# Altium PCB PCB_arduino_uno_cong_polygon.PcbDoc
Units mm, origin at the board's own origin, x right, y up, seen from the top; angles counter-clockwise.
Board outline 82.8 x 51.56 mm, 2 copper layers (Top Layer, Bottom Layer); 55 components, 54 nets, 241 pads, 63 vias.
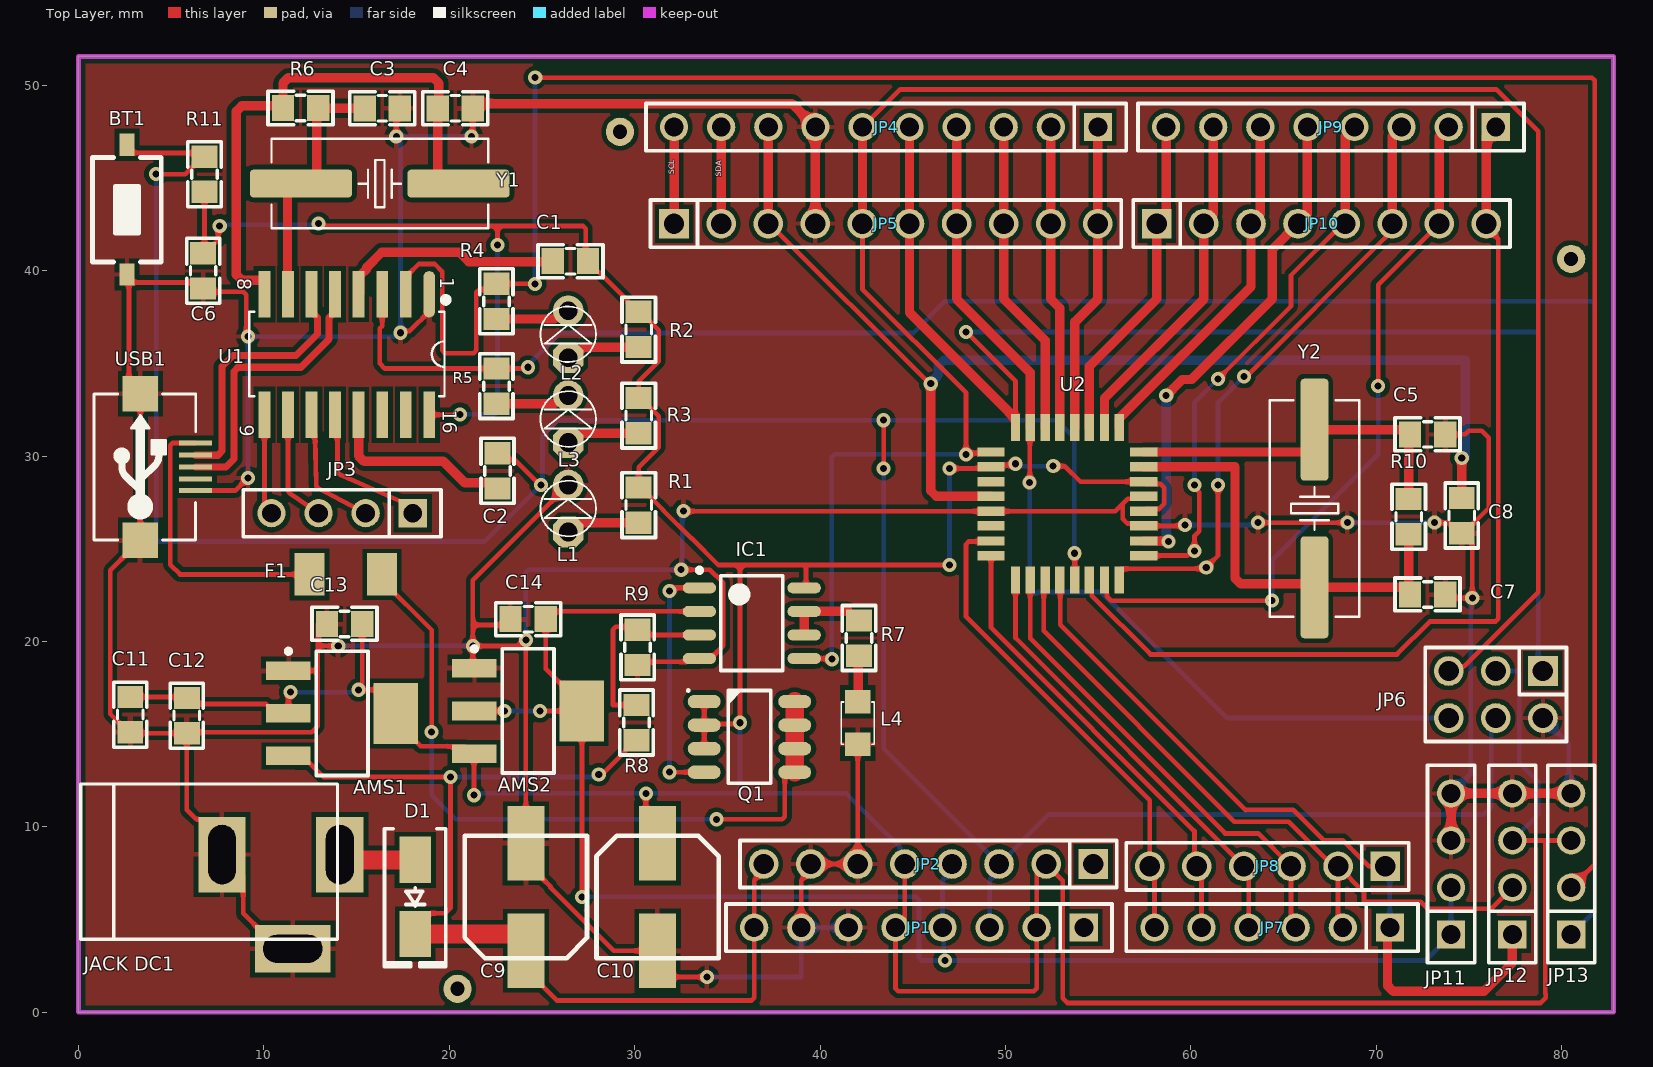
[diagram p0: Top Layer view]
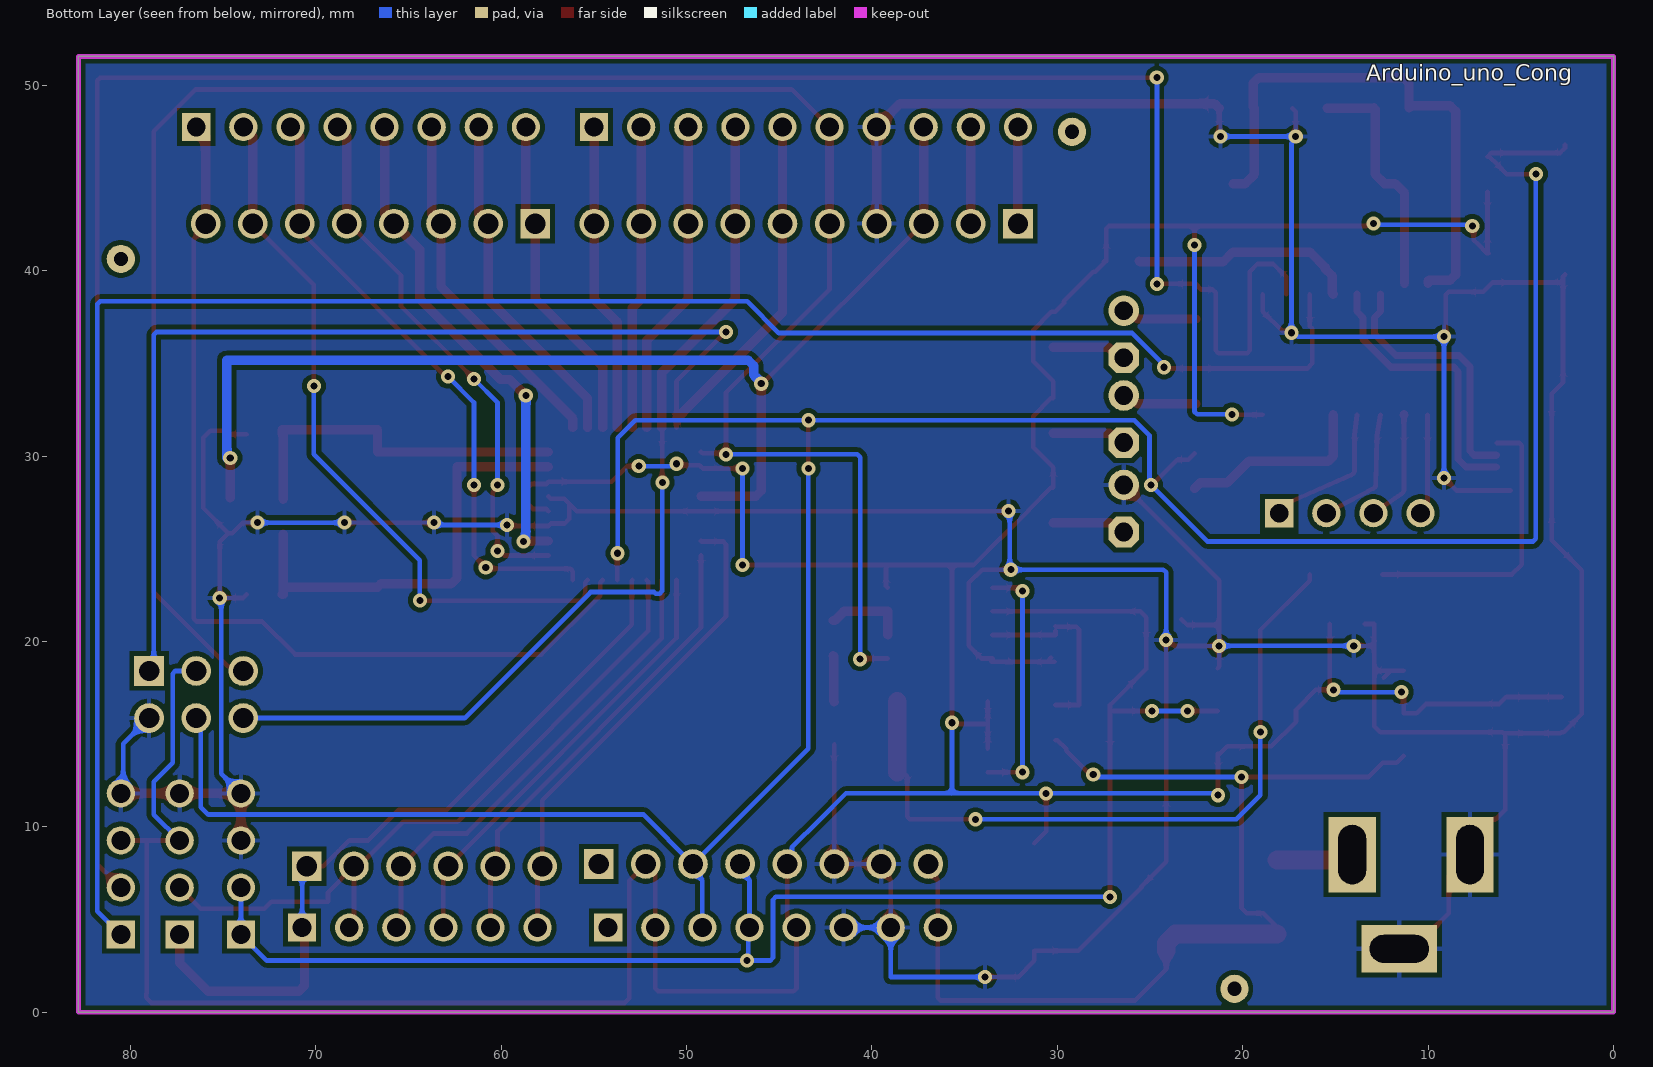
[diagram p1: Bottom Layer view, seen from below]
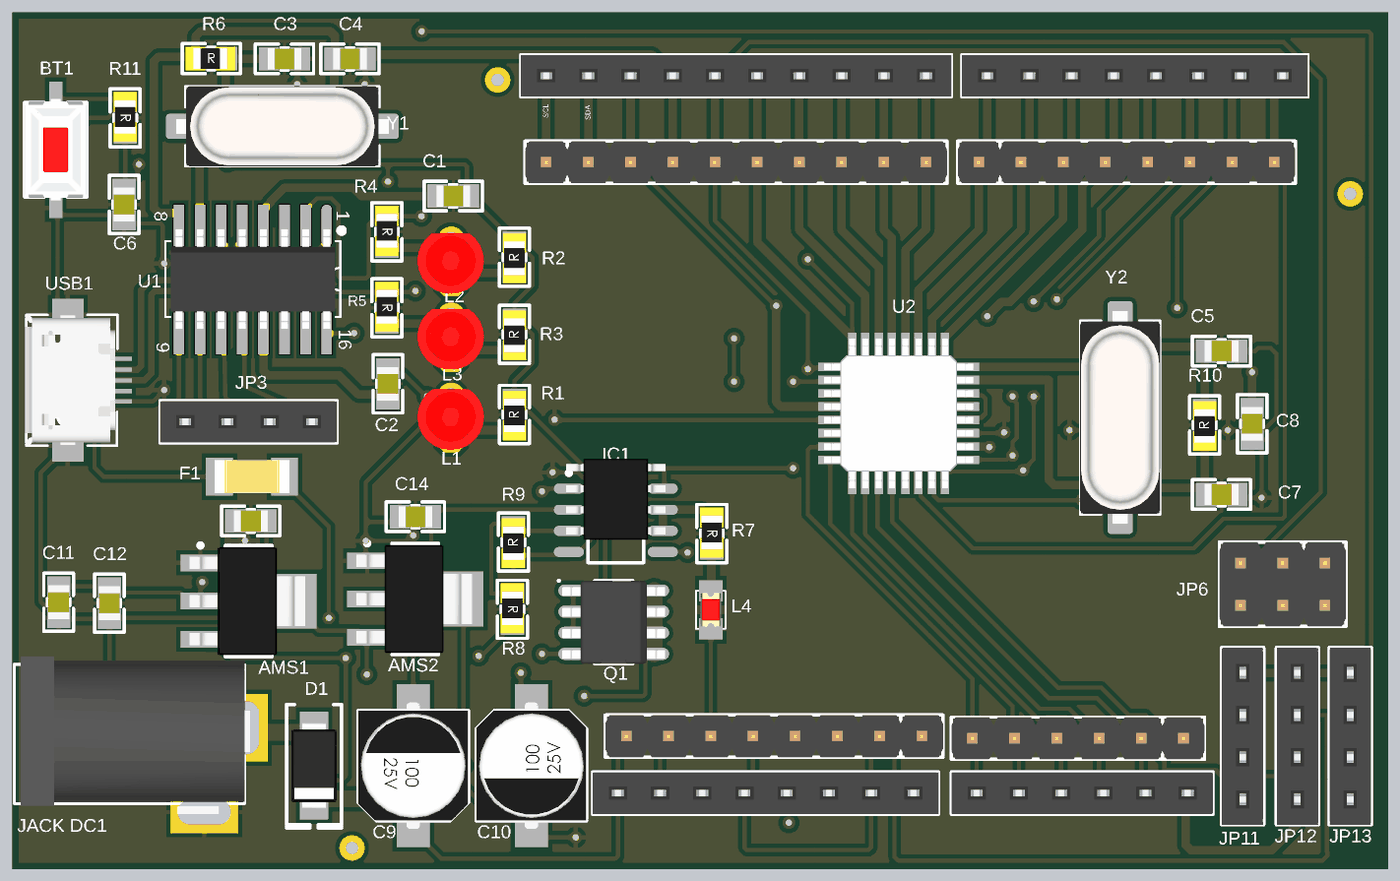
[diagram p2: 3D render of the assembled board from above, using the file's embedded part models]

## Layer stack, top to bottom
Top Solder: solder mask 0.0102, Solder Resist, Dk 3.5
Top Layer: signal copper 0.0356
Dielectric 1: dielectric 0.32, FR-4, Dk 4.8
Bottom Layer: signal copper 0.0356
Bottom Solder: solder mask 0.0102, Solder Resist, Dk 3.5

## Board outline
0,0 82.804,0 82.804,51.562 0,51.562

## Design rules (kind name [scope] priority, off if disabled: settings)
Clearance [All] p1: gap=0.254 ignorepadtopadclearanceinfootprint=FALSE except(0: Arc-Hole Track-Hole SMDPad-Hole THPad-Hole Via-Hole Fill-Hole Poly-Hole Region-Hole Text-Hole)
DiffPairsRouting [All] p1: maxlimit=0.254 minlimit=0.254 mostfreqgap=0.254 toplayer_minwidth=0.381 toplayer_maxwidth=0.381 toplayer_prefwidth=0.381 bottomlayer_minwidth=0.381 bottomlayer_maxwidth=0.381 bottomlayer_prefwidth=0.381 maxuncoupledlength=12.7
PolygonConnect [All] p1: connectstyle=Relief reliefconductorwidth=0.254 reliefentries=4 polygonreliefangle="90 Angle" airgapwidth=0.254
RoutingVias [All] p1: holewidth=0.381 width=0.762 viastyle="Through Hole" minholewidth=0.254 minwidth=0.508 maxholewidth=0.711 maxwidth=1.27
SolderMaskExpansion [IsVia] p1: expansion=0.102 istentingtop=TRUE
SolderMaskExpansion SolderMaskExpansion_1 [IsVia] p2: expansion=0.102 istentingtop=TRUE useseparateexpansions=TRUE expansionbottom=0.102 istentingbottom=TRUE
Width [All] p1: maxlimit=1.016 minlimit=0.254 preferedwidth=0.508
29 further rules are at their usual default settings.

## Classes and differential pairs
differential pair USB: +USB_P -USB_N

## Components (designator, comment, footprint, x,y, rotation, side; value= is the part's Value field where it differs from the comment)
AMS1 "AMS1117-3.3V" SOT223 14.224,16.129 r270 top value="AMS1117-3.3V SOT223"
AMS2 "AMS1117-3.3V" SOT223 24.257,16.256 r270 top value="AMS1117-3.3V SOT223"
BT1 "Nut Nhan 2 Chan SMD 3x6x2.5" "Nut Nhan 2 Chan SMD 3x6x2.5" 2.616,43.296 r90 top
C1 "104" "tu 0805" 26.543,40.513 r180 top
C2 "104" "tu 0805" 22.606,29.21 r270 top
C3 "22pF" "tu 0805" 16.383,48.768 r0 top
C4 "22pF" "tu 0805" 20.32,48.768 r0 top
C5 "104" "tu 0805" 72.772,31.18 r0 top
C6 "104" "tu 0805" 6.731,40.005 r270 top
C7 "104" "tu 0805" 72.772,22.544 r0 top
C8 "104" "tu 0805" 74.619,26.802 r270 top
C9 "47uF" "tu nhom 6.3 (d)" 24.13,6.223 r90 top
C10 "47uF" "tu nhom 6.3 (d)" 31.242,6.223 r270 top
C11 "104" "tu 0805" 2.791,16.059 r90 top
C12 "104" "tu 0805" 5.842,16.002 r90 top
C13 "104" "tu 0805" 14.351,20.955 r0 top
C14 "104" "tu 0805" 24.257,21.209 r0 top
D1 "M7" "DIODE SMA" 18.161,6.223 r270 top
F1 "0.5A 125V" "Cau Chi SMD1808" 14.427,23.622 r0 top
IC1 "LM358 SOP8" "SOP 8" 36.322,20.993 r0 top
"JACK DC1" "JACK DC 5.5" "JACK DC 5.5" 10.922,5.969 r0 top value="Jac DC"
JP1 "JP 1x8 2.54" "JP 1x8 CT" 54.229,4.572 r180 top
JP2 "JP 1x8 2.54" "JP 1x8 DT" 54.737,8.001 r180 top
JP3 "JP 1x4 2.54" "JP 1x4 CT" 18.034,26.924 r180 top
JP4 "JP 1x10 2.54" "JP 1x10 CT" 54.991,47.752 r180 top
JP5 "JP 1x10 2.54" "JP 1x10 DT" 32.127,42.545 r0 top
JP6 "JP 2x3 2.54" "JP 2x3 DT" 76.454,17.145 r180 top
JP7 "JP 1x6 2.54" "JP 1x6 CT" 70.739,4.572 r180 top
JP8 "JP 1x6 2.54" "JP 1x6 DT" 70.485,7.874 r180 top
JP9 "JP 1x8 2.54" "JP 1x8 CT" 76.45,47.752 r180 top
JP10 "JP 1x8 2.54" "JP 1x8 DT" 58.166,42.545 r0 top
JP11 "JP 1x4 2.54" "JP 1x4 CT" 74.041,4.191 r90 top
JP12 "JP 1x4 2.54" "JP 1x4 CT" 77.343,4.191 r90 top
JP13 "JP 1x4 2.54" "JP 1x4 CT" 80.518,4.191 r90 top
L1 "LED 3mm" LED-3MM-RED 26.416,25.908 r90 top
L2 "LED 3mm" LED-3MM-RED 26.416,35.306 r90 top
L3 "LED 3mm" LED-3MM-RED 26.416,30.734 r90 top
L4 "LED 0805" LED-0805-Red 42.037,16.747 r270 top
Q1 "MOSFET_P" SO-8 36.195,14.859 r0 top
R1 "1k" "tro smd 0805" 30.16,27.362 r90 top
R2 "1k" "tro smd 0805" 30.16,36.83 r90 top
R3 "1k" "tro smd 0805" 30.16,32.188 r90 top
R4 "1k" "tro smd 0805" 22.606,38.354 r270 top
R5 "1k" "tro smd 0805" 22.606,33.782 r270 top
R6 "1M" "tro smd 0805" 11.98,48.844 r0 top
R7 "1k" "tro smd 0805" 42.162,20.193 r270 top
R8 "10k" "tro smd 0805" 30.16,15.634 r270 top
R9 "10k" "tro smd 0805" 30.099,19.685 r90 top
R10 "10k" "tro smd 0805" 71.694,26.732 r90 top
R11 "10k" "tro smd 0805" 6.858,45.212 r270 top
U1 "CH340C" SOIC16_50_284_25X90_SMT 14.503,35.485 r270 top
U2 "ATMEGA168-20AU" ATMEGA168 53.34,27.432 r180 top
USB1 "USB Micro 5p SMD" "USB Micro 5p SMD" 6.307,29.415 r90 top
Y1 "16Mhz" "Thach Anh 2 chan SMD" 16.256,44.704 r180 top value=4Mhz
Y2 "16Mhz" "Thach Anh 2 chan SMD" 66.675,27.178 r90 top value=4Mhz

## Footprints (in the part's own frame and the unit in brackets; to place one, negate y for a bottom-side part, rotate by r counter-clockwise, add the part's x,y. Pads: shape width x height; smd on the part's side, far side on the other; paste and mask are expansions set on the pad)
ATMEGA168 [mil]
  rect 58x20 smd: 1(-162,110) 2(-162,79) 3(-162,47) 4(-162,16) 5(-162,-16) 6(-162,-47) 7(-162,-79) 8(-162,-110) 17(162,-110) 18(162,-79) 19(162,-47) 20(162,-16) 21(162,16) 22(162,47) 23(162,79) 24(162,110)
  rect 20x58 smd: 9(-110,-162) 10(-79,-162) 11(-47,-162) 12(-16,-162) 13(16,-162) 14(47,-162) 15(79,-162) 16(110,-162) 25(110,162) 26(79,162) 27(47,162) 28(16,162) 29(-16,162) 30(-47,162) 31(-79,162) 32(-110,162)
  body extent -177,-177 177,177, height 47
"Cau Chi SMD1808" [mil]
  rect 64x90 smd: 1(-77,0) 2(77,0)
  body extent -91,-39 91,39, height 39
"DIODE SMA" [mm] "SMA"
  rect 2.5x1.7 smd: 1(-2,0) 2(2,0)
  silkscreen extent -3.68,-1.65 3.75,1.65, body extent -2.6,-1.37 2.6,1.37, height 2.4
"JACK DC 5.5" [mm] "Jac DC input"
  rect 2.54x4.064 hole 1.5 slot 3.2 at 90 deg: 1(3.175,2.54) 2(-3.175,2.54)
  rect 4.064x2.54 hole 1.5 slot 3.2 at 0 deg: 3(0.635,-2.54)
  silkscreen extent -10.79,-2.03 3.05,6.35, body extent -10.42,-2.67 3.4,6.84, height 11.02
"JP 1x4 CT" [mm]
  rect 1.52x1.52 hole 1.02: 1(0,0)
  round 1.52 hole 1.02: 2(2.54,0) 3(5.08,0) 4(7.62,0)
  silkscreen extent -1.52,-1.27 9.14,1.27, body extent -1.52,-1.25 9.14,1.25, height 8.51
"JP 1x6 CT" [mm] "6 row, straight, gold plating"
  rect 1.52x1.52 hole 1.02: 1(0,0)
  round 1.52 hole 1.02: 2(2.54,0) 3(5.08,0) 4(7.62,0) 5(10.16,0) 6(12.7,0)
  silkscreen extent -1.52,-1.27 14.22,1.27, body extent -1.52,-1.25 14.22,1.25, height 8.51
"JP 1x6 DT" [mm] "6 pins, 1 row, straight, gold plating"
  rect 1.6x1.6 hole 1.1: 1(0,0)
  round 1.6 hole 1.1: 2(2.54,0) 3(5.08,0) 4(7.62,0) 5(10.16,0) 6(12.7,0)
  silkscreen extent -1.27,-1.27 13.97,1.27, body extent -1.27,-1.27 13.97,1.27, height 8.54
"JP 1x8 CT" [mm] "8 row, straight, gold plating"
  rect 1.52x1.52 hole 1.02: 1(0,0)
  round 1.52 hole 1.02: 2(2.54,0) 3(5.08,0) 4(7.62,0) 5(10.16,0) 6(12.7,0) 7(15.24,0) 8(17.78,0)
  silkscreen extent -1.52,-1.27 19.3,1.27, body extent -1.52,-1.25 19.3,1.25, height 8.51
"JP 1x8 DT" [mm] "8 pins, 1 row, straight, gold plating"
  rect 1.6x1.6 hole 1.1: 1(0,0)
  round 1.6 hole 1.1: 2(2.54,0) 3(5.08,0) 4(7.62,0) 5(10.16,0) 6(12.7,0) 7(15.24,0) 8(17.78,0)
  silkscreen extent -1.27,-1.27 19.05,1.27, body extent -1.27,-1.27 19.05,1.27, height 8.54
"JP 1x10 CT" [mm] "10 row, straight, gold plating"
  rect 1.52x1.52 hole 1.02: 1(0,0)
  round 1.52 hole 1.02: 2(2.54,0) 3(5.08,0) 4(7.62,0) 5(10.16,0) 6(12.7,0) 7(15.24,0) 8(17.78,0) 9(20.32,0) 10(22.86,0)
  silkscreen extent -1.52,-1.27 24.38,1.27, body extent -1.52,-1.25 24.38,1.25, height 8.51
"JP 1x10 DT" [mm] "10 pins, 1 row, straight, gold plating"
  rect 1.6x1.6 hole 1.1: 1(0,0)
  round 1.6 hole 1.1: 2(2.54,0) 3(5.08,0) 4(7.62,0) 5(10.16,0) 6(12.7,0) 7(15.24,0) 8(17.78,0) 9(20.32,0) 10(22.86,0)
  silkscreen extent -1.27,-1.27 24.13,1.27, body extent -1.27,-1.27 24.13,1.27, height 8.54
"JP 2x3 DT" [mm]
  rect 1.6x1.6 hole 1.1: 1(-2.54,-1.27)
  round 1.6 hole 1.1: 2(0,-1.27) 3(2.54,-1.27) 4(2.54,1.27) 5(0,1.27) 6(-2.54,1.27)
  silkscreen extent -3.81,-2.54 3.81,2.54, body extent -3.81,-2.54 3.81,2.54, height 8.55
LED-3MM-RED [mil]
  oct 65x65 hole 40: 1(0,0)
  round 65 hole 40: 2(100,0)
  silkscreen extent -9,-59 109,59, body extent -27,-77 117,80, height 181
LED-0805-Red [mil]
  rect 50x55 smd: 1(0,0) 2(90,0)
  silkscreen extent 0,-35 90,35, body extent 5,-25 85,25, height 43
"Nut Nhan 2 Chan SMD 3x6x2.5" [mm] "Switch SMD type"
  rect 1.2x0.8 smd: 1(-3.5,0) 2(3.5,0)
  silkscreen extent -2.82,-1.85 2.82,1.85, body extent -3.05,-1.85 3.05,1.85, height 2.5
SO-8 [mm] "SOIC, 8-Leads, Body 4.90x3.90mm, Pitch 1.27mm, IPC Medium Density"
  oval 1.78x0.72 smd: 1(-2.44,1.905) 2(-2.44,0.635) 3(-2.44,-0.635) 4(-2.44,-1.905) 5(2.44,-1.905) 6(2.44,-0.635) 7(2.44,0.635) 8(2.44,1.905)
  silkscreen extent -3.3,-2.5 1.14,2.5, body extent -3.1,-2.5 3.1,2.5, height 1.75
SOIC16_50_284_25X90_SMT [mm]
  oval 2.5x0.635 smd mask+0.076: 1(-3.25,4.42)
  rect 2.5x0.635 smd mask+0.076: 2(-3.25,3.15) 3(-3.25,1.88) 4(-3.25,0.61) 5(-3.25,-0.66) 6(-3.25,-1.93) 7(-3.25,-3.2) 8(-3.25,-4.47) 9(3.25,-4.47) 10(3.25,-3.2) 11(3.25,-1.93) 12(3.25,-0.66) 13(3.25,0.61) 14(3.25,1.88) 15(3.25,3.15) 16(3.25,4.42)
  silkscreen extent -3.07,-5.3 2.26,5.44, body extent -3.02,-4.97 2.98,4.93, height 1.4
"SOP 8" [mm] "SOIC, 8-Leads, Body 4.9x3.9mm, Pitch 1.27mm, IPC High Density"
  oval 1.8x0.6 smd: 1(-2.825,1.905) 2(-2.825,0.635) 3(-2.825,-0.635) 4(-2.825,-1.905) 5(2.825,-1.905) 6(2.825,-0.635) 7(2.825,0.635) 8(2.825,1.905)
  silkscreen extent -2.95,-2.55 1.68,2.98, body extent -2.99,-1.18 3,3.72, height 1.8
SOT223 [mm]
  rect 1x2.4 smd: 1(-2.3,-2.9) 2(0,-2.9) 3(2.3,-2.9)
  rect 3.3x2.4 smd: 4(0,2.9)
  silkscreen extent -3.47,-3.02 3.35,1.4, body extent -3.25,-3.56 3.25,3.4, height 1.68
"Thach Anh 2 chan SMD" [mm] "SMD Crystal HC49/US-SM package"
  round 0.508 on Mech15: 0(0,0)
  rrect25% 5.5x1.5 smd: 1(-4.25,0) 2(4.25,0)
  silkscreen extent -5.84,-2.41 5.84,2.41, body extent -6.4,-2.41 6.4,2.42, height 4.29
"tro smd 0805" [mm]
  rect 1.2x1.4 smd: 1(-0.946,-0.061) 2(0.954,-0.061)
  silkscreen extent -1.75,-0.97 1.75,0.84, body extent -1.56,-0.76 1.44,0.64, height 0.53
"tu 0805" [mm] "Compoment SMD 80x50mil"
  rect 1.2x1.4 smd: 1(-0.946,-0.003) 2(0.954,-0.003)
  silkscreen extent -1.75,-0.89 1.75,0.89, body extent -1.01,-0.64 1.01,0.63, height 0.61
"tu nhom 6.3 (d)" [mm]
  rect 4x2 smd: 1(-2.9,0) 2(2.9,0)
  silkscreen extent -3.3,-3.3 3.3,3.3, body extent -3.8,-3.3 3.8,3.3, height 8
"USB Micro 5p SMD" [mil]
  rect 10x70 smd: 1(51.18,0) 2(25.59,0) 3(0,0) 4(-25.59,0) 5(-50,0)
  rect 74.8x74.8 smd: 5(-155.51,116.84) 5(155.51,116.84)
  silkscreen extent -155,-1 155,215, body extent -157,5 158,218, height 107

## Part data
AMS1 AMS2: library part "AMS1117 SMD", "Dán", Chung_Loai=Dán, Don_Vi=Con, Ma_Hang=MH000596
C1 C2 C5 C6 C7 C8 C11 C12 C13 C14: library part "Tu 0805 104 50V 10%", "Dán", Chung_Loai=Dán, Don_Vi=Con, Ma_Hang=MH004551, So_Chan=2, Ten_Linh_Kien="Tụ 0805 104-100nF 10% 50V"
C3 C4: library part "Tu 0805 22pF 50V 10%", "Dán", Chung_Loai=Dán, Don_Vi=Con, Ma_Hang=MH004560, So_Chan=2, Ten_Linh_Kien="Tụ 0805 22P 10% 50V"
C9 C10: library part "Tu Nhom 47uF 25V", "Dán", Chung_Loai=Dán, Don_Vi=Con, Ma_Hang=MH002216, So_Chan=2, Ten_Linh_Kien="Tụ Nhôm 47uF 25V 6.3x5.5MM"
D1: library part "Diode M7 ( 4007 )", "Dán", Chung_Loai=Dán, Don_Vi=Con, Ma_Hang=MH000944, Ten_Linh_Kien="Diode M7 1N4007 SMD 1A 1000V"
F1: library part "Cau chi 0.5A 125V SMD1808", "Cau chi 0.5A 125V SMD1808", Ma_Hang=MH009241, Ten="Cầu Chì 0.5A 125V SMD1808 0451.500MRL"
IC1: "Dán", Chung_Loai=Dán, Don_Vi=Con, Ma_Hang=MH000609, Ten_Linh_Kien="LM358 SOP8"
JP1 JP9: library part "JP 1x8 2.54 Cai Thang", "Cắm", Chung_Loai=Cắm, Don_Vi=Con, Ma_Hang=MH004006, Ten_Linh_Kien="Jump Đơn Cái 2.54MM 1x20P Thẳng"
JP2 JP10: library part "JP 1x8 2.54 Duc Thang", "Cắm", Chung_Loai=Cắm, Don_Vi=Con, Ma_Hang=MH000903, Ten_Linh_Kien="Jump Đơn Đực 2.54MM 1x40P Thẳng 11MM"
JP3 JP11 JP12 JP13: library part "JP 1x4 2.54 Cai Thang", "Cắm", Chung_Loai=Cắm, Don_Vi=Con, Ma_Hang=MH004006, Ten_Linh_Kien="Jump Đơn Cái 2.54MM 1x20P Thẳng"
JP4: library part "JP 1x10 2.54 Cai Thang", "Cắm", Chung_Loai=Cắm, Don_Vi=Con, Ma_Hang=MH004006, Ten_Linh_Kien="Jump Đơn Cái 2.54MM 1x20P Thẳng"
JP5: library part "JP 1x10 2.54 Duc Thang", "Cắm", Chung_Loai=Cắm, Don_Vi=Con, Ma_Hang=MH000903, Ten_Linh_Kien="Jump Đơn Đực 2.54MM 1x40P Thẳng 11MM"
JP6: library part "JP 2x3 2.54 Duc Thang", "Cắm", Chung_Loai=Cắm, Don_Vi=Con, Ma_Hang=MH002686, Ten_Linh_Kien="Jump Đôi Đực 2.54MM 2x40P Thẳng 11MM"
JP7: library part "JP 1x6 2.54 Cai Thang", "Cắm", Chung_Loai=Cắm, Don_Vi=Con, Ma_Hang=MH004006, Ten_Linh_Kien="Jump Đơn Cái 2.54MM 1x20P Thẳng"
JP8: library part "JP 1x6 2.54 Duc Thang", "Cắm", Chung_Loai=Cắm, Don_Vi=Con, Ma_Hang=MH000903, Ten_Linh_Kien="Jump Đơn Đực 2.54MM 1x40P Thẳng 11MM"
L1 L2 L3: library part "LED 3mm Do", "Cắm", Chung_Loai=Cắm, Don_Vi=Con, Ma_Hang=MH003892, Ten_Linh_Kien="Led 3MM Phủ Đỏ (10c)"
L4: library part "LED 0805 Do", "Dán", Chung_Loai=Dán, Don_Vi=Con, Ma_Hang=MH000897, Ten_Linh_Kien="LED 0805 Màu Đỏ (Red)"
Q1: library part Q000008, "MOSFET P-CH 30V 5.8A 8-SOIC", Current - Continuous Drain (Id) @ 25°C="5.8A (Ta)", Drain to Source Voltage (Vdss)=30V, Input Capacitance (Ciss) @ Vds="1100pF @ 25V", Manufacturer="Infineon Technologies Americas Corp.", Manufacturer Part Number=IRF7406TRPBF, Operating Temperature="-55°C ~ 150°C (TJ)", Power - Max=2.5W, Supplier Part Number 1=IRF7406PBFCT-ND, FET Feature=Standard, FET Type="MOSFET P-Channel, Metal Oxide", Gate Charge (Qg) @ Vgs="59nC @ 10V", HelpURL=http://www.irf.com/product-info/datasheets/data/irf7406pbf.pdf, Part Number=Q000008, Rds On (Max) @ Id, Vgs="45 mOhm @ 2.8A, 10V", Supplier 1=Digi-Key, Vgs(th) (Max) @ Id="1V @ 250µA"
R1 R2 R3 R4 R5: library part "Tro 0805 1% 1k", "Dán", Chung_Loai=Dán, Don_Vi=Con, Ma_Hang=MH005468, So_Chan=2, Ten_Linh_Kien="Trở 0805 1% 1k"
R6: library part "Tro 0805 5% 1M", "Dán", Chung_Loai=Dán, Don_Vi=Con, Ma_Hang=MH005235, So_Chan=2, Ten_Linh_Kien="Trở 0805 5% 1M"
R7: library part "Tro 0805 5% 1k", "Dán", Chung_Loai=Dán, Don_Vi=Con, Ma_Hang=MH005234, So_Chan=2, Ten_Linh_Kien="Trở 0805 5% 1k"
R8 R9 R10: library part "Tro 0805 1% 10k", "Dán", Chung_Loai=Dán, Don_Vi=Con, Ma_Hang=MH005473, So_Chan=2, Ten_Linh_Kien="Trở 0805 1% 10k"
R11: library part "Tro 0805 5% 10k", "Dán", Chung_Loai=Dán, Don_Vi=Con, Ma_Hang=MH005239, So_Chan=2, Ten_Linh_Kien="Trở 0805 5% 10k"
U1: "USB Bridge, USB to UART USB 2.0 UART Interface", Alternate Part Number-1=NA, Case/Package=SOIC16, Manufacturer=Olimex, Supplier Part Number-1=C84681, Manufacturer Part Number=CH340C, Supplier-1=LCSC
U2: "AVR AVRÂ® ATmega Microcontroller IC 8-Bit 20MHz 16KB _8K x 16_ FLASH 32-TQFP _7x7_", Package="TQFP-32 Microchip", Availability=Unavailable, MF=Microchip, MP=ATMEGA168-20AU, Price=None, SnapEDA_Link=https://www.snapeda.com/parts/ATMEGA168-20AU/Microchip/view-part/776709/?ref=snap
USB1: "USB Type B", Ma_Hang=MH001020, Ten="MicroUSB MK5P SMD"
Y1 Y2: library part "Thach Anh 2 chan SMD", "Crystal For all Crystal 2pin."
BT1: Ma_Hang=MH001036, Ten="Nút Nhấn 2 Chân 3x6x2.5MM SMD"

## Free pads (board coordinates)
  round 1.524 hole 0.762: 1(29.21,47.498) 3(20.447,1.27) 3(80.518,40.64)

## Via types
v1: diameter 0.762, hole 0.381, Top Layer to Bottom Layer, tented both sides, 63 vias

## Nets (pads, with @x,y where several pads share a name; then routed paths per layer and width w, separated by ;. In a path a pad name is that pad's centre, name@x,y a point inside that pad or via, vN(x,y) a via of type N, cw(c..) or ccw(c..) an arc to the next point about the centre after c; other vN are vias at no path point)
3.3V: AMS2.2 AMS2.4 C14.2 IC1.2 JP1.4 JP2.4 JP11.1 JP11.2 | length 88.8
  Top Layer w0.254: AMS2.2 v1(22.987,16.256) ; v1(24.897,16.256) AMS2.4 v1(27.157,6.231) ; AMS2.4@27.157,16.354 27.157,16.579 25.211,18.525 25.211,21.306 25.534,21.628 IC1.2 ; JP1.4 JP1.4@46.672,4.508 ; v1@46.672,2.857 v1(46.736,2.794)
  Bottom Layer w0.254: v1@23.114,16.256 v1(24.897,16.256) ; v1(27.157,6.231) 45.182,6.231 45.339,6.074 45.339,2.943 45.488,2.794 v1(46.736,2.794) ; JP2.4 47.117,7.637 46.609,7.129 JP1.4 46.672,4.508 46.672,2.857 v1(46.736,2.794) ; JP11.2 JP11.1 72.644,2.794 v1(46.736,2.794)
+5: AMS1.2 AMS1.4 AMS2.3 C1.1 C6.1 C10.1 C11.2 C12.2 C13.2 IC1.8 JP1.2 JP1.5 JP2.2 JP2.5 JP6.2 JP12.3 JP13.3 Q1.1 Q1.2 Q1.3 R1.2 R2.2 R3.2 R11.2 U1.16 U2.4 U2.6 U2.18 | length 246.8
  Top Layer w0.254: C11.2 5.789,17.013 6.165,16.637 10.116,16.637 10.624,16.129 AMS1.2 11.324,17.166 v1(11.43,17.272) ; R11.2 6.797,41.02 C6.1 6.828,40.951 7.301,41.424 7.537,41.66 7.537,42.335 v1(7.62,42.418) ; v1(12.954,42.545) 13.051,42.448 13.327,42.448 13.357,42.418 22.606,42.418 ; C13.2 15.305,17.729 15.113,17.536 v1(15.113,17.399) 16.051,17.399 17.124,16.326 17.124,15.679 18.452,14.351 20.835,14.351 AMS2.3@21.357,13.829 ; U1.16 20.574,32.235 v1(20.574,32.258) ; v1(21.336,11.713) 21.336,13.71 21.357,13.731 AMS2.3 ; v1(22.606,41.382) 22.606,42.418 ; C1.1@27.389,40.516 27.362,40.516 27.362,42.269 27.213,42.418 22.606,42.418 ; C1.1 27.489,40.416 27.962,39.943 28.062,39.943 29.648,38.357 29.648,38.257 30.121,37.784 30.321,37.784 31.302,36.803 31.302,35.127 30.221,34.046 R3.2 30.321,33.142 31.302,32.161 31.302,30.484 30.221,29.403 R1.2 30.321,28.316 31.558,27.078 31.558,27.054 33.02,25.592 33.045,25.592 34.507,24.13 35.687,24.13 ; v1(30.607,11.811) 30.607,9.758 C10.1 ; Q1.3 Q1.2 ; Q1.1 Q1.2 ; IC1.8 39.243,22.994 39.243,23.981 39.094,24.13 ; JP2.5 44.577,5.08 JP1.5 44.069,1.292 44.218,1.143 51.54,1.143 51.689,1.292 JP1.2 51.689,7.493 JP2.2 53.088,7.11 53.088,0.76 53.34,0.508 78.867,0.508 79.143,0.784 79.143,0.994 79.121,1.016 79.121,9.233 ; v1(46.99,24.13) 39.094,24.13 ; v1(46.99,29.337) 49.124,29.337 U2.18 49.301,29.515 50.47,29.515 v1(50.546,29.591) ; v1(52.578,29.464) 53.213,29.464 54.051,28.626 U2.6 57.582,28.499 58.373,28.499 58.572,28.299 58.572,27.427 58.298,27.153 57.582,27.153 U2.4 ; JP6.2@76.454,18.288 JP6.2 ; JP12.3 JP13.3 ; Q1.2 33.818,15.557 35.623,15.557 v1(35.687,15.621) 35.687,24.13 ; 35.687,24.13 39.094,24.13
  Bottom Layer w0.254: v1(7.62,42.418) 7.683,42.481 12.89,42.481 v1(12.954,42.545) ; v1(11.43,17.272) 14.986,17.272 v1(15.113,17.399) ; v1(20.574,32.258) 22.457,32.258 22.606,32.407 v1(22.606,41.382) ; v1@21.336,11.811 v1(30.607,11.811) 35.687,11.811 ; v1(35.687,15.621) 35.687,11.811 ; JP2.5 44.319,8.259 44.319,8.894 42.799,10.414 41.402,11.811 35.687,11.811 ; v1(46.99,24.13) v1(46.99,29.337) ; v1(50.546,29.591) 50.673,29.464 v1(52.578,29.464) ; JP6.2 77.575,18.415 77.724,18.266 77.724,13.462 78.74,12.446 78.74,10.668 JP12.3
A0: JP7.6 JP8.6 U2.23 | length 26.3
  Top Layer w0.254: U2.23 49.2,25.4 48.028,25.4 47.879,25.251 47.879,21.336 57.785,11.43 JP8.6 58.039,7.62 JP7.6
A1: JP7.5 JP8.5 U2.24 | length 24.8
  Top Layer w0.254: U2.24 49.225,20.752 60.198,9.779 60.198,8.001 JP8.5 60.579,7.62 JP7.5
A2: JP7.4 JP8.4 U2.25 | length 24
  Top Layer w0.254: U2.25 50.546,20.193 JP8.4 63.119,7.62 JP7.4
A3: JP7.3 JP8.3 U2.26 | length 25.7
  Top Layer w0.254: U2.26 51.333,20.168 61.849,9.652 63.627,9.652 JP8.3 65.405,4.826 JP7.3
A4: JP7.2 JP8.2 JP12.2 U2.27 | length 38.8
  Top Layer w0.254: U2.27 52.07,23.241 52.07,20.574 62.357,10.287 65.278,10.287 67.437,8.128 68.072,8.128 68.072,8.001 JP8.2 ; JP7.2 67.945,4.826 JP8.2 ; JP12.2 76.202,5.59 72.79,5.59 72.411,5.969 69.342,5.969 69.342,6.477 JP8.2
A5: JP7.1 JP8.1 JP12.1 U2.28 | length 41.3
  Top Layer w0.254: U2.28 52.959,23.292 52.959,20.911 62.97,10.9 62.992,10.922 65.532,10.922 67.183,9.271 68.199,9.271 68.644,8.826 cw(c67.945,7.874) 68.897,8.573 69.596,7.874 JP8.1 ; JP7.1@70.485,4.826 JP7.1
  Top Layer w0.508: JP7.1 70.612,4.445 70.612,1.441 70.91,1.143 75.817,1.143 77.343,2.669 JP12.1
  Bottom Layer w0.254: JP8.1 70.739,7.62 JP7.1
AREF: C8.1 JP4.8 JP5.3 U2.20 | length 64
  Top Layer w0.254: JP5.3 37.272,42.545 45.908,33.909 v1(45.974,33.909)
  Top Layer w0.508: JP5.3 37.211,42.549 JP4.8 ; v1(45.974,33.909) 45.974,28.136 46.272,27.838 U2.20 ; C8.1 v1(74.615,29.911)
  Bottom Layer w0.508: v1(45.974,33.909) 45.974,33.978 46.382,34.386 46.382,34.881 46.68,35.179 74.803,35.179 74.803,29.911 v1(74.615,29.911)
CH340_XT1: C3.1 R6.2 U1.7 Y1.2 | length 13
  Top Layer w0.508: U1.7@11.278,39.318 11.278,44.208 11.774,44.704 12.354,44.704 12.85,45.2 12.85,48.699 R6.2 12.944,48.774 15.428,48.774 C3.1
CH340_XT2: C4.1 R6.1 U1.8 Y1.1 | length 29.5
  Top Layer w0.508: U1.8@10.008,39.318 10.008,39.458 9.97,39.497 8.807,39.497 8.509,39.795 8.509,48.597 8.807,48.895 10.923,48.895 R6.1 11.034,50.121 11.332,50.419 19.133,50.419 19.431,50.121 19.431,48.821 C4.1 19.374,45.2 19.87,44.704 Y1.1
GND: "JACK DC1.2" "JACK DC1.3" AMS1.1 AMS2.1 BT1.1 C3.2 C4.2 C5.2 C6.2 C7.2 C8.2 C9.2 C10.2 C11.1 C12.1 C13.1 C14.1 IC1.4 JP1.6 JP1.7 JP2.6 JP2.7 JP4.7 JP5.4 JP6.6 JP11.3 JP11.4 JP12.4 JP13.4 L1.2 L4.2 R9.1 U1.1 U2.3 U2.5 U2.21 USB1.5 | length 315.6
  Top Layer w0.254: BT1.1 BT1.1@2.724,39.689 ; USB1.5@5.545,28.145 8.46,28.145 v1(9.144,28.829) ; C12.1@5.945,15.056 6.002,15.113 12.573,15.113 12.905,15.445 12.905,18.429 ; v1(9.144,36.449) 9.047,36.546 9.047,38.713 8.898,38.862 7.016,38.862 6.508,39.37 2.889,39.37 2.724,39.535 BT1.1@2.724,39.689 ; AMS1.1 AMS1.1@12.024,18.429 ; 11.557,3.429 10.795,3.429 8.89,5.334 8.89,7.366 7.747,8.509 7.747,9.271 6.604,10.414 6.35,10.414 5.845,10.919 C12.1 2.851,15.056 C11.1 2.694,15.113 1.713,16.094 1.713,23.84 3.339,25.465 3.339,33.365 2.724,33.98 BT1.1@2.724,39.689 ; AMS1.1@12.397,18.056 AMS1.1@12.024,18.429 ; C13.1 12.905,20.952 12.905,19.768 ; v1(14.014,19.768) 12.905,19.768 ; v1(17.145,47.244) 17.145,48.572 C3.2 ; v1(17.377,36.66) 17.474,36.757 17.877,36.757 18.923,37.802 U1.1 ; v1(21.209,47.244) 21.274,47.309 C4.2 ; v1@21.274,19.694 21.274,18.639 AMS2.1 ; v1@21.274,19.856 21.274,20.894 ; v1@21.367,19.694 21.431,19.758 23.67,19.758 23.998,20.086 v1(24.135,20.086) 24.135,8.118 25.461,6.792 25.461,6.735 28.873,3.323 C10.2 31.242,2.778 32.115,1.905 v1(33.909,1.905) ; C14.1 23,20.894 21.274,20.894 ; L1.2 21.274,23.306 21.274,20.894 ; R9.1@30.16,18.904 IC1.4@33.558,18.904 ; R9.1@30.348,19.12 R9.1@30.545,18.923 ; v1(32.512,23.876) 34.042,23.876 34.339,23.579 34.379,23.579 34.778,23.18 34.778,19.769 34.097,19.088 IC1.4 ; v1(32.639,27.051) 32.664,27.026 U2.21 55.925,27.026 56.337,27.437 ; JP1.7 38.989,7.129 39.497,7.637 JP2.7 JP2.6 L4.2 ; U2.5 57.328,27.711 56.611,27.711 56.337,27.437 ; v1(59.69,26.289) 59.639,26.238 U2.3 57.328,26.365 56.586,26.365 56.337,26.614 56.337,27.437 ; v1(63.627,26.416) v1(68.453,26.416) ; v1(73.152,26.416) 73.947,26.416 74.515,25.848 C8.2 C8.2@74.711,25.848 ; C7.2 73.915,22.352 v1(75.184,22.352) 75.184,25.375 C8.2@74.711,25.848 ; C5.2 74.803,31.177 74.995,31.369 75.692,31.369 76.073,30.988 76.073,27.205 74.715,25.848 C8.2@74.711,25.848 ; AMS1.1@12.024,18.429 12.905,18.429 ; 12.905,18.429 12.905,19.768
  Top Layer w0.508: C4.2 21.53,49.02 38.483,49.02 JP4.7 39.749,47.75 39.749,42.547 JP5.4 ; JP11.3 JP11.4 JP12.4 JP13.4
  Bottom Layer w0.254: v1(9.144,28.829) v1(9.144,36.449) 17.029,36.449 17.24,36.66 v1(17.377,36.66) 17.377,46.874 17.145,47.107 v1(17.145,47.244) v1(21.209,47.244) ; v1(14.014,19.768) v1@21.186,19.768 ; v1(24.135,20.086) 24.135,23.727 24.284,23.876 v1(32.512,23.876) 32.575,23.939 32.575,26.987 v1(32.639,27.051) ; v1(33.909,1.905) 38.989,1.905 JP1.7 JP1.6 ; v1(59.69,26.289) 63.5,26.289 v1(63.627,26.416) ; v1(68.453,26.416) v1(73.152,26.416) ; JP11.4 75.095,12.865 75.095,22.263 v1(75.184,22.352) ; JP6.6 80.391,14.478 80.391,11.938 JP13.4
  other v1: 21.274,19.758
IO_0: JP9.1 JP10.8 U2.30 | length 51.9
  Top Layer w0.254: U2.30 54.661,23.19 54.661,22.474 57.83,19.304 71.12,19.304 72.898,21.082 76.432,21.082 76.581,21.231 76.581,41.723 75.946,42.358 JP10.8
  Top Layer w0.508: JP10.8 75.946,47.248 JP9.1
IO_1: JP9.2 JP10.7 U2.31 | length 39.4
  Top Layer w0.254: U2.31 55.474,23.19 55.474,22.448 55.722,22.2 64.364,22.2 v1(64.389,22.225) ; v1(70.104,33.782) 70.104,39.243 JP10.7
  Top Layer w0.508: JP10.7 73.406,47.248 JP9.2
  Bottom Layer w0.254: v1(64.389,22.225) 64.389,24.384 70.104,30.099 v1(70.104,33.782)
IO_2: JP9.3 JP10.6 U2.32 | length 33.5
  Top Layer w0.254: U2.32 56.134,23.8 56.261,23.927 60.757,23.927 v1(60.833,24.003) 60.833,24.005 61.468,24.64 v1(61.468,28.448) ; v1(62.865,34.29) 62.992,34.29 70.475,41.773 70.475,41.79 70.866,42.181 JP10.6
  Top Layer w0.508: JP10.6 70.866,47.248 JP9.3
  Bottom Layer w0.254: v1(61.468,28.448) 61.468,32.893 v1(62.865,34.29)
IO_3: JP9.4 JP10.5 U2.1 | length 29.6
  Top Layer w0.254: U2.1 59.817,24.638 60.071,24.892 v1(60.198,24.892) 60.198,25.69 60.452,25.944 60.452,28.057 60.198,28.311 v1(60.198,28.448) ; v1(61.468,34.163) 65.405,38.1 65.405,39.751 68.199,42.545 JP10.5
  Top Layer w0.508: JP10.5 68.326,47.248 JP9.4
  Bottom Layer w0.254: v1(60.198,28.448) 60.198,32.893 v1(61.468,34.163)
IO_4: JP9.5 JP10.4 U2.2 | length 27.2
  Top Layer w0.508: U2.2 58.776,25.425 v1(58.801,25.4) ; v1(58.674,33.274) 59.535,34.135 60.043,34.135 64.389,38.481 64.389,41.148 JP10.4 66.29,43.049 JP9.5
  Bottom Layer w0.508: v1(58.674,33.274) 58.674,25.596 58.801,25.469 v1(58.801,25.4)
IO_5: JP9.6 JP10.3 U2.9 | length 19.4
  Top Layer w0.508: U2.9 56.134,32.029 63.246,39.141 JP10.3 63.75,43.049 JP9.6
IO_6: JP9.7 JP10.2 U2.10 | length 18.6
  Top Layer w0.508: U2.10 55.347,33.122 60.706,38.481 JP10.2 61.21,43.049 JP9.7
IO_7: JP9.8 JP10.1 U2.11 | length 17.9
  Top Layer w0.508: U2.11 54.534,34.849 58.166,38.481 JP10.1 58.67,43.049 JP9.8
IO_8: JP4.1 JP5.10 U2.12 | length 16.7
  Top Layer w0.508: U2.12 53.746,37.241 54.987,38.481 JP5.10 54.987,47.748 JP4.1
IO_9: JP4.2 JP5.9 U2.13 | length 16.4
  Top Layer w0.508: JP4.2 52.447,47.748 JP5.9 52.447,38.481 52.934,37.994 U2.13
IO_10: JP4.3 JP5.8 U2.14 | length 17.1
  Top Layer w0.508: JP4.3 49.907,47.748 JP5.8 49.907,38.481 52.146,36.242 U2.14
IO_11: JP4.4 JP5.7 JP6.4 U2.15 | length 52.5
  Top Layer w0.254: v1(51.308,28.575) 51.321,28.588 51.321,31.534 U2.15 ; JP6.4@73.85,15.938 JP6.4
  Top Layer w0.508: JP4.4 47.367,47.748 JP5.7 47.367,38.481 51.333,34.514 U2.15
  Bottom Layer w0.254: v1(51.308,28.575) 51.308,22.733 51.457,22.584 51.667,22.584 51.752,22.669 55.181,22.669 61.976,15.875 JP6.4 JP6.4@73.787,16.002
IO_12: JP4.5 JP5.6 JP6.1 U2.16 | length 73.9
  Top Layer w0.254: v1(47.879,36.703) 50.546,34.036 50.546,32.029 U2.16 ; JP6.1@78.74,18.669 JP6.1
  Top Layer w0.508: JP4.5 44.827,47.748 JP5.6 44.827,37.749 U2.16@50.546,32.029
  Bottom Layer w0.254: v1(47.879,36.703) 78.591,36.703 78.74,36.554 78.74,18.669 JP6.1
IO_13: IC1.5 JP4.6 JP5.5 JP6.3 U2.17 | length 111.1
  Top Layer w0.254: IC1.5 40.475,19.088 40.513,19.05 v1(40.64,19.05) ; JP5.5 42.287,39.005 47.879,33.413 v1(47.879,30.099) 47.942,30.162 49.162,30.162 U2.17 ; JP4.6 44.323,49.784 76.477,49.784 78.74,47.521 78.74,22.671 74.741,18.673 74.172,18.673 JP6.3
  Top Layer w0.508: JP5.5 42.291,42.549 JP4.6
  Bottom Layer w0.254: v1(40.64,19.05) 40.64,29.95 40.789,30.099 v1(47.879,30.099) ; JP6.3@73.66,18.669 JP6.3
NetC1_2: C1.2 U1.4 | length 12.2
  Top Layer w0.508: U1.4 15.177,38.798 15.177,39.731 15.558,40.112 15.558,40.195 16.363,41.001 20.549,41.001 21.057,40.493 25.565,40.493 C1.2
NetC2_2: C2.2 U1.13 | length 10.4
  Top Layer w0.508: U1.13 15.113,30.016 15.411,29.718 19.685,29.718 20.828,28.575 22.283,28.575 C2.2
NetD1_1: "JACK DC1.1" D1.1 | length 4.2
  Top Layer w1.016: 14.097,8.509 14.383,8.223 D1.1
NetF1_1: F1.1 USB1.1 | length 15.6
  Top Layer w0.254: USB1.1 5.083,30.715 4.953,30.585 4.953,24.152 5.483,23.622 F1.1
NetIC1_1: IC1.1 Q1.4 | length 13.3
  Top Layer w0.254: v1(31.877,12.954) Q1.4 ; v1(31.877,22.733) 32.014,22.733 32.179,22.898 IC1.1
  Bottom Layer w0.254: v1(31.877,12.954) v1(31.877,22.733)
NetIC1_3: IC1.3 R8.1 R9.2 | length 10.3
  Top Layer w0.254: R8.1 28.829,16.58 28.829,20.643 28.978,20.792 30.068,20.792 R9.2@30.099,20.823 ; R9.2@30.099,20.59 30.099,20.358 IC1.3
NetIC1_6: IC1.6 IC1.7 R7.1 | length 4.4
  Top Layer w0.508: IC1.6 IC1.7 41.512,21.628 42.002,21.139 R7.1
NetJP3_1: JP3.1 U1.12 | length 8.4
  Top Layer w0.254: U1.12 13.97,31.112 13.97,29.236 ccw(c14.224,29.236) 14.122,29.003 17.401,27.557 JP3.1 17.619,27.339 JP3.1@17.573,27.385
NetJP3_2: JP3.2 U1.11 | length 6.9
  Top Layer w0.254: U1.11 12.763,31.112 12.824,28.471 ccw(c13.078,28.477) 12.96,28.251 JP3.2
NetJP3_3: JP3.3 U1.10 | length 6.2
  Top Layer w0.254: U1.10 11.303,28.2 ccw(c11.557,28.2) 11.413,27.991 JP3.3
NetJP3_4: JP3.4 U1.9 | length 5.7
  Top Layer w0.254: U1.9 10.033,26.924 JP3.4
NetL1_1: L1.1 R1.1 | length 4
  Top Layer w0.508: L1.1 26.68,25.908 27.188,26.416 R1.1
NetL2_1: L2.1 R2.1 | length 4
  Top Layer w0.508: L2.1 26.68,35.306 27.258,35.884 R2.1
NetL2_2: L2.2 R4.2 | length 4.1
  Top Layer w0.508: R4.2 25.66,37.4 26.107,37.846 L2.2
NetL3_1: L3.1 R3.1 | length 4
  Top Layer w0.508: L3.1 26.68,30.734 27.188,31.242 R3.1
NetL3_2: L3.2 R5.2 | length 4.1
  Top Layer w0.508: R5.2 25.66,32.828 26.107,33.274 L3.2
NetL4_1: L4.1 R7.2 | length 2.5
  Top Layer w0.508: L4.1 42.069,16.78 42.069,19.206 R7.2
RESET: BT1.2 C2.1 JP1.3 JP2.3 JP6.5 R11.1 U2.29 | length 155.2
  Top Layer w0.254: BT1.2 2.616,46.628 2.889,46.355 6.6,46.355 R11.1 ; v1(4.191,45.212) 5.752,45.212 6.224,45.685 R11.1@6.697,46.158 ; C2.1 22.953,29.805 23.535,29.805 24.892,28.448 v1(24.956,28.448) ; v1(43.434,29.337) v1(43.434,31.941) ; v1(53.721,24.765) 53.746,24.74 U2.29
  Bottom Layer w0.254: v1(4.191,45.212) 4.191,25.549 4.34,25.4 21.907,25.4 24.86,28.353 v1@25.051,28.353 ; v1(24.956,28.448) v1@25.051,28.353 ; v1(43.434,29.337) 43.434,14.224 JP2.3 ; JP1.3 49.149,7.129 49.657,7.637 JP2.3 ; v1(53.721,24.765) 53.721,30.988 52.768,31.941 v1(43.434,31.941) 25.845,31.941 25.036,31.131 25.036,28.367 v1@25.051,28.353 ; JP6.5 76.202,15.623 76.202,11.073 75.797,10.668 52.324,10.668 JP2.3
RXD: JP13.1 R5.1 U1.3 | length 105.6
  Top Layer w0.254: U1.3 16.383,37.019 16.256,36.892 16.256,35.003 16.532,34.728 R5.1 24.187,34.728 v1(24.257,34.798)
  Bottom Layer w0.254: v1(24.257,34.798) 24.257,34.924 25.972,36.639 45.021,36.639 46.736,38.354 81.639,38.354 81.788,38.205 81.788,5.461 JP13.1
SCL: JP4.10 JP5.1 | length 5.2
  Top Layer w0.508: JP5.1 32.131,42.549 JP4.10
SDA: JP4.9 JP5.2 | length 5.2
  Top Layer w0.508: JP5.2 34.671,42.549 JP4.9
TXD: JP13.2 R4.1 U1.2 | length 128.5
  Top Layer w0.254: U1.2 17.653,39.668 18.351,40.366 19.212,40.366 19.621,39.957 19.621,35.709 19.77,35.56 21.314,35.56 21.463,35.709 21.463,38.84 21.612,38.989 22.235,38.989 R4.1 22.549,39.296 v1(24.624,39.296) ; v1(24.638,50.419) 81.639,50.419 81.788,50.27 81.788,8.001 JP13.2
  Bottom Layer w0.254: v1(24.624,39.296) 24.631,39.303 24.631,50.412 v1(24.638,50.419)
USB_N: U1.6 USB1.2 | length 14.3
  Top Layer w0.381: USB1.2 6.322,30.05 7.524,30.05 7.747,30.274 7.747,34.838 8.342,35.433 11.738,35.433 12.89,36.585 12.89,37.485 12.573,37.802 U1.6
USB_P: U1.5 USB1.3 | length 15.4
  Top Layer w0.381: USB1.3 7.952,29.415 8.382,29.845 8.382,34.575 8.605,34.798 12.001,34.798 13.525,36.322 13.525,37.485 13.843,37.802 U1.5
VBUS: F1.2 Q1.5 Q1.6 Q1.7 Q1.8 | length 39.4
  Top Layer w0.254: F1.2 16.383,23.292 19.05,20.625 v1(19.05,15.113) ; v1(34.417,10.414) 37.951,10.414 38.1,10.563 38.1,12.739 38.315,12.954 Q1.5 ; Q1.8 Q1.8@38.724,16.853
  Top Layer w1.016: Q1.5 Q1.6 Q1.7 Q1.8
  Bottom Layer w0.254: v1(19.05,15.113) 19.05,11.706 20.342,10.414 v1(34.417,10.414)
VIN: AMS1.3 C9.1 D1.2 JP1.8 JP2.8 R8.2 | length 58
  Top Layer w0.254: AMS1.3 11.697,13.456 12.452,13.456 13.208,12.7 v1(20.066,12.7) 20.066,5.622 19.79,5.346 18.884,5.346 18.161,4.623 D1.2 ; C9.1 24.13,2.323 25.818,0.635 36.3,0.635 36.449,0.784 36.449,7.129 36.957,7.637 JP2.8 ; v1(28.067,12.827) 28.164,12.924 28.344,12.924 29.526,14.107 29.526,14.207 29.999,14.68 R8.2
  Top Layer w1.016: D1.2 23.638,4.223 24.13,3.731 C9.1
  Bottom Layer w0.254: v1(20.066,12.7) 27.94,12.7 v1(28.067,12.827)
XTAL_1: C7.1 R10.1 U2.7 Y2.1 | length 23.8
  Top Layer w0.508: U2.7 62.386,29.439 62.386,23.412 62.684,23.114 66.489,23.114 Y2.1 C7.1@71.755,22.928 ; R10.1 C7.1@71.755,22.928 ; C7.1 71.755,22.541 C7.1@71.755,22.928
XTAL_2: C5.1 R10.2 U2.8 Y2.2 | length 19.4
  Top Layer w0.508: U2.8 66.675,30.226 Y2.2 71.826,31.428 C5.1 71.755,31.177 R10.2
pads on no net: JP1.1 JP2.1 U1.14 U1.15 U2.19 U2.22 USB1.4 Y1.0 Y2.0

## Polygon pours and split planes (outlines as drawn)
GND on Top Layer "GND_L01_P000" (solid, remove dead copper, pour order 0): 82.804,0 82.804,51.562 0,51.562 0,0
GND on Bottom Layer "GND_L02_P001" (solid, remove dead copper, pour order 1): 82.55,0.254 0.127,0.254 0.127,51.562 82.55,51.562

## Keep-outs
Keep-Out Layer:
  lines w0.254: 0,0 0,1.905 0,49.149 0,51.448 0,51.562 0.208,51.562 82.804,51.562 82.804,50.454 82.804,0.753 82.804,0 81.153,0 2.921,0 0,0

## Silkscreen, mask and mechanical layers (free items; w line width, h text height)
Top Overlay:
  text "SCL" at 32.253,45.212 h0.5 r90
  text "SDA" at 34.793,45.085 h0.5 r90
Bottom Overlay:
  text "Arduino_uno_Cong" at 13.335,49.941 h1.5

## Text inside footprints (layer, text, board x,y; h text height)
U1: Top Overlay "16" at 19.41,32.498 h1.27 r270; Top Overlay "9" at 8.446,31.706 h1.27 r270; Top Overlay "8" at 8.323,39.6 h1.27 r270; Top Overlay "1" at 19.276,39.639 h1.27 r270